# Altium PCB M52.PcbDoc
Units mil, origin at the board's own origin, x right, y up, seen from the top; angles counter-clockwise.
Board outline 3543.31 x 2274.02 mil, 2 copper layers (Top Layer, Bottom Layer); 9 components, 82 nets, 204 pads, 66 vias.
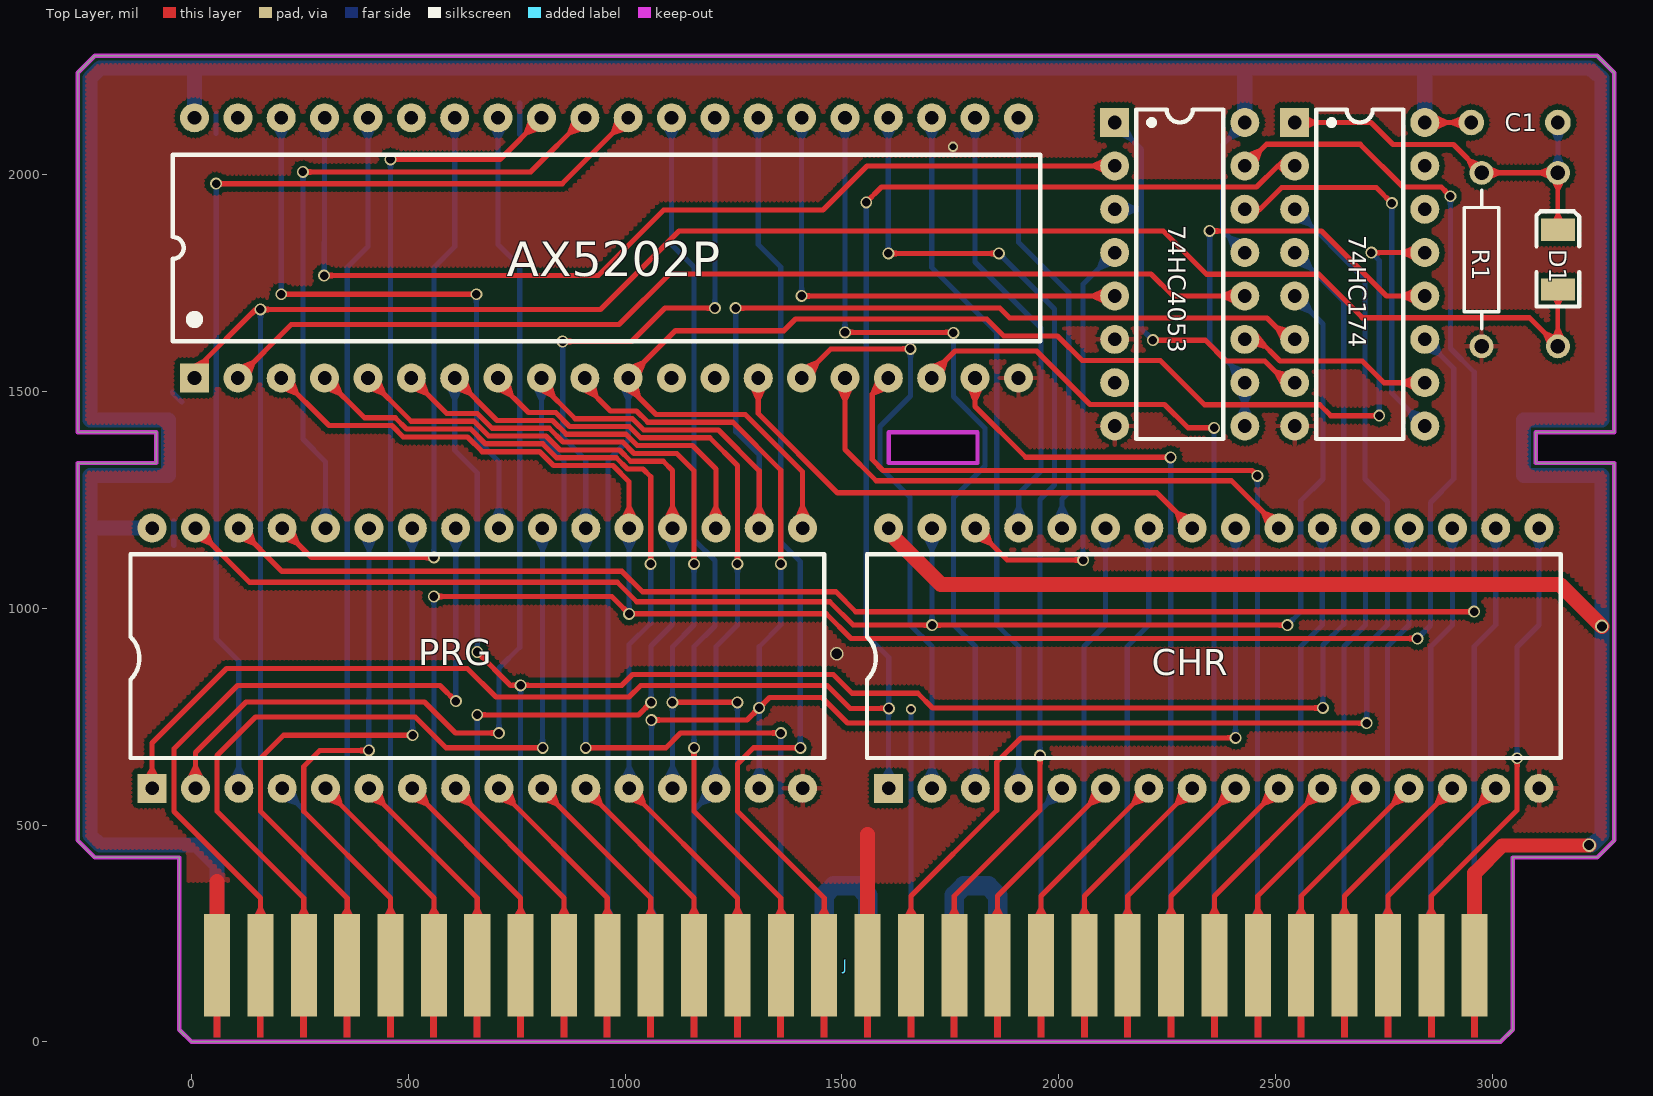
[diagram p0: Top Layer view]
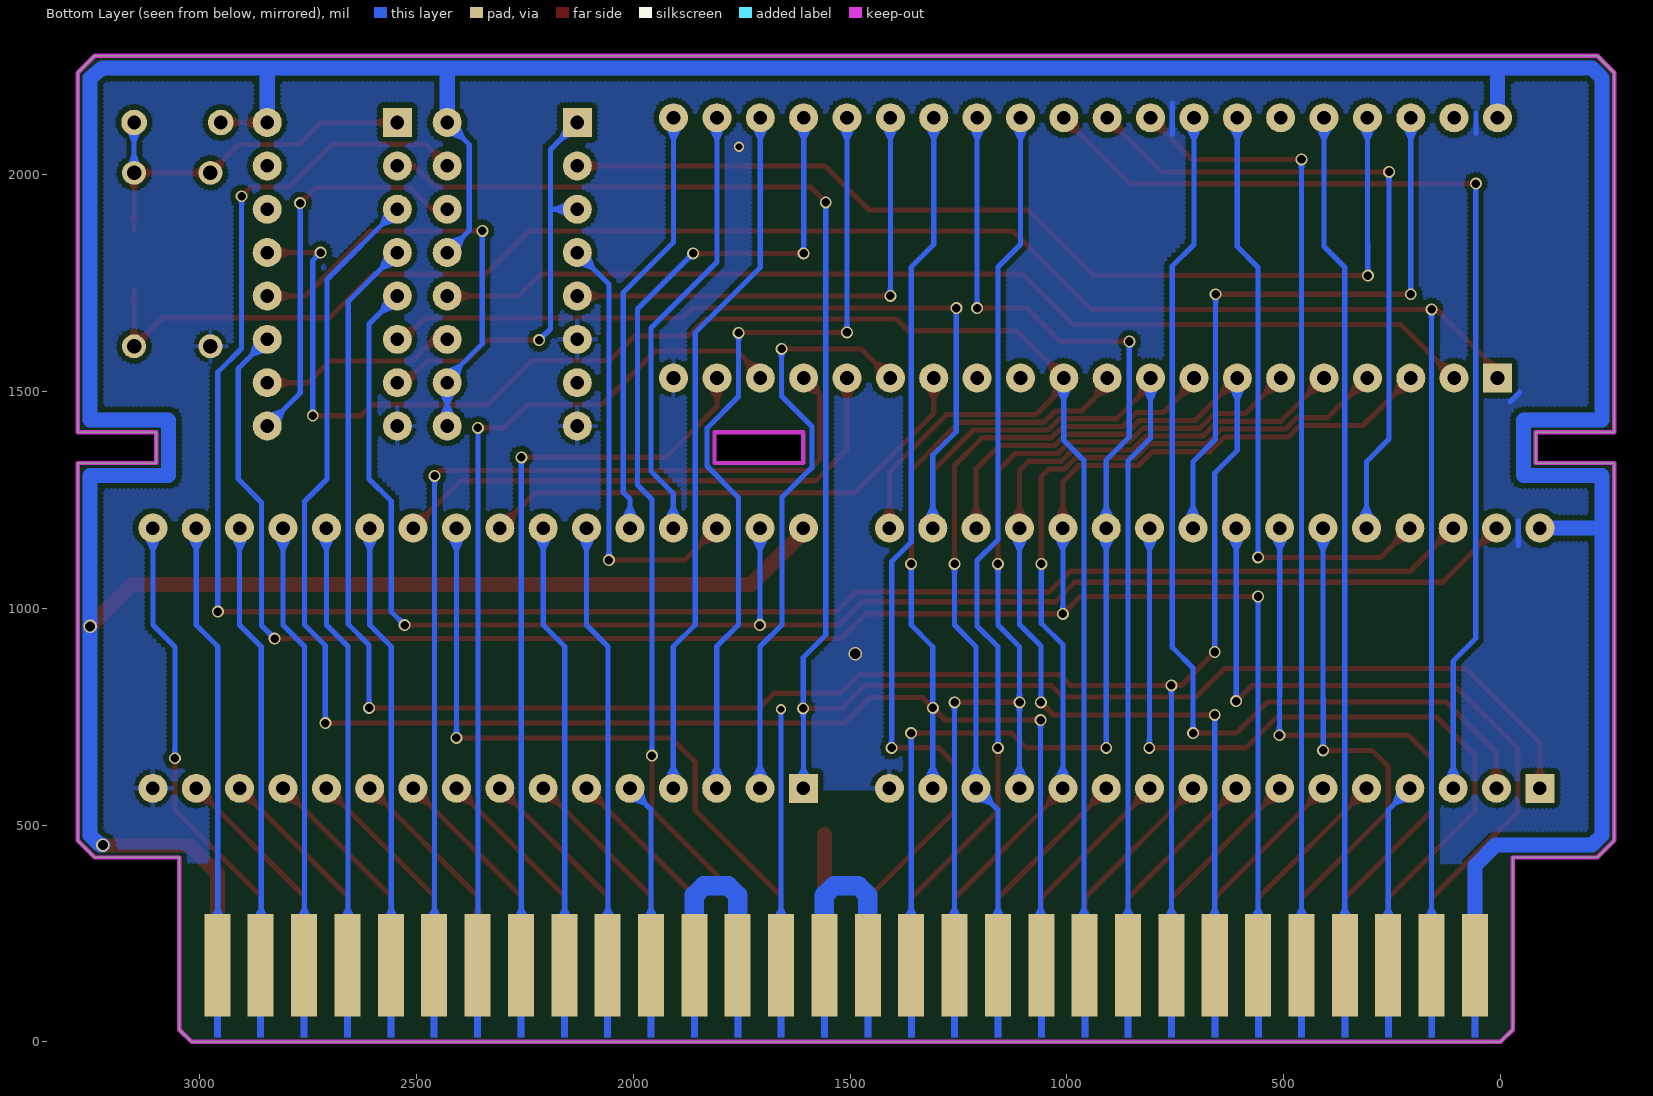
[diagram p1: Bottom Layer view, seen from below]
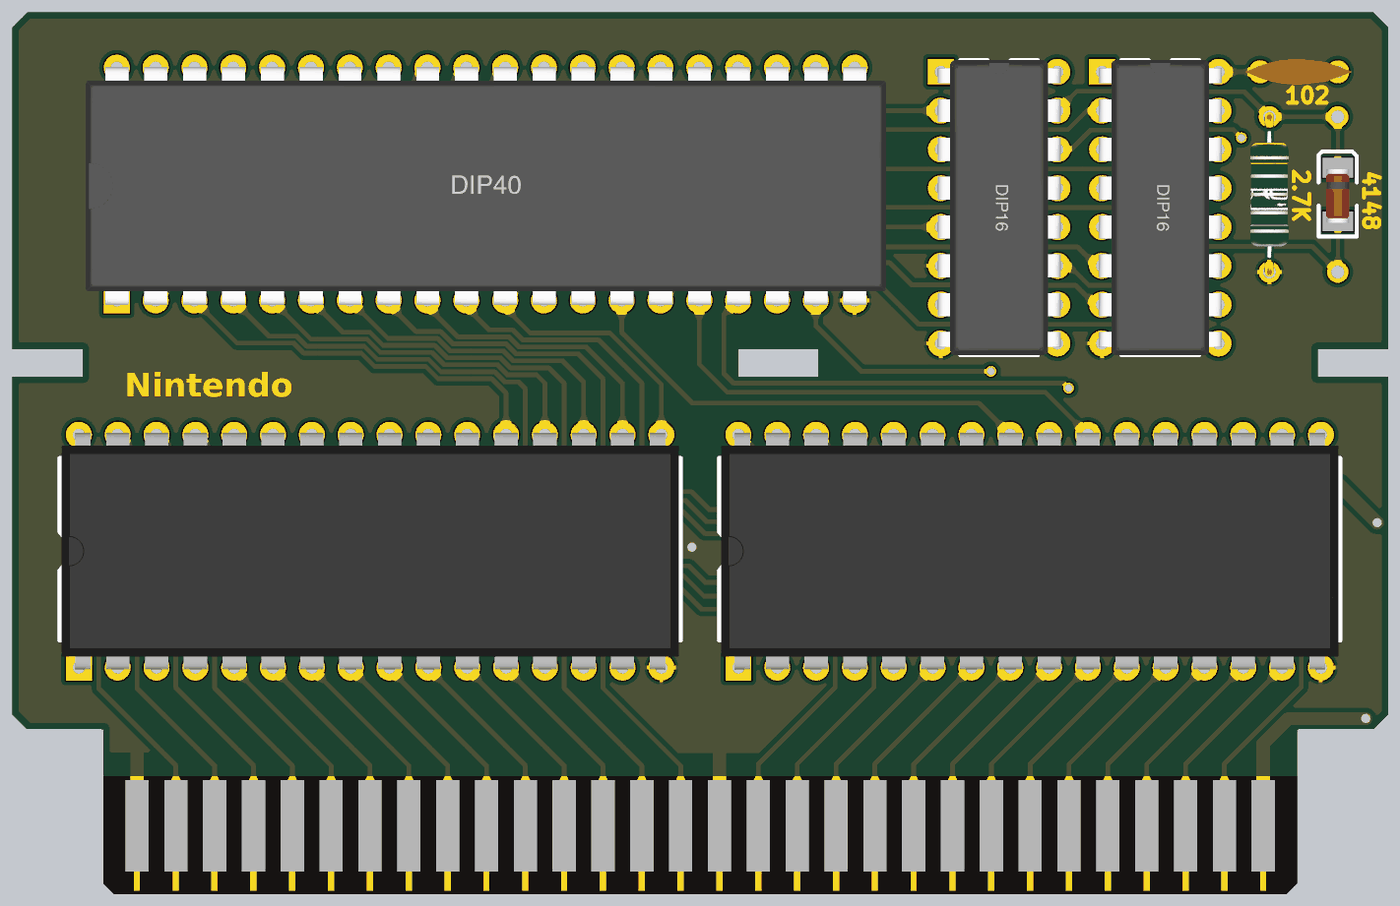
[diagram p2: 3D render of the assembled board from above, using the file's embedded part models]

## Layer stack, top to bottom
Top Solder: solder mask 0.4, Solder Resist, Dk 3.5
Top Layer: signal copper 1.4
Dielectric 1: dielectric 12.6, FR-4, Dk 4.8
Bottom Layer: signal copper 1.4
Bottom Solder: solder mask 0.4, Solder Resist, Dk 3.5

## Board outline
-222.94,425.2 -28,425.2 -28,28 0,0 3018.69,0 3046.69,28 3046.69,425.2 3241.63,425.2 3281,464.57 3281,1334.65 3099.9,1334.65 3099.9,1405.51 3281,1405.51 3281,2234.65 3241.63,2274.02 -222.94,2274.02 -262.31,2234.65 -262.31,1405.51 -81.2,1405.51 -81.2,1334.65 -262.31,1334.65 -262.31,464.57
cut-out: 1608,1334.65 1812.72,1334.65 1812.72,1405.51 1608,1405.51

## Design rules (kind name [scope] priority, off if disabled: settings)
Clearance [All] p1: gap=6 ignorepadtopadclearanceinfootprint=FALSE except(12: Arc-Poly Track-Poly SMDPad-Poly THPad-Poly Via-Poly Fill-Poly Poly-Poly)
HoleSize [All] p1: absolutevalues=TRUE maxlimit=255.91 minlimit=1 maxpercent=80.000 minpercent=20.000
HoleToHoleClearance [All] p1: gap=1 allowstackedmicrovias=TRUE
MinimumSolderMaskSliver [All] p1: minsoldermaskwidth=1
PolygonConnect PolygonConnect_1 [IsPad] p1: connectstyle=Relief reliefconductorwidth=10 reliefentries=4 polygonreliefangle="90 Angle" airgapwidth=10
PolygonConnect [All] p2: connectstyle=Direct reliefconductorwidth=10 reliefentries=4 polygonreliefangle="90 Angle" airgapwidth=10
RoutingVias [All] p1: holewidth=15.75 width=23.62 viastyle="Through Hole" minholewidth=15.75 minwidth=23.62 maxholewidth=196.85 maxwidth=216.54
SilkToSilkClearance [All] p1: silktosilkclearance=0
SilkToSolderMaskClearance [IsPad] p1: minsilkscreentomaskgap=0 clearancetoexposedcopper=TRUE
SolderMaskExpansion [All] p1: expansion=4
Width [All] p1: maxlimit=50 minlimit=6 preferedwidth=12
25 further rules are at their usual default settings.

## Components (designator, comment, footprint, x,y, rotation, side; value= is the part's Value field where it differs from the comment)
74HC174 "CD74HC174" DIP16 2694,1770 r0 top locked (schematic designator U4)
74HC4053 "74HC4053" DIP16 2279,1770 r0 top locked (schematic designator U5)
AX5202P "AX5202P" DIP40 957,1830.83 r90 top locked (schematic designator U1)
C1 "" RAD-0.2 3151,2120 r180 top
CHR "27C801" DIP32 2357.62,884.65 r90 top locked (schematic designator U8)
D1 "" 4148 3151,1735 r90 top
J "60P" 60P-3(J)(L) 1509,177 r0 top locked
PRG "27C801" DIP32 659.24,884.65 r90 top locked (schematic designator U7)
R1 "" AXIAL0.4 2935,2134 r270 top

## Footprints (in the part's own frame and the unit in brackets; to place one, negate y for a bottom-side part, rotate by r counter-clockwise, add the part's x,y. Pads: shape width x height; smd on the part's side, far side on the other; paste and mask are expansions set on the pad)
60P-3(J)(L) [mil]
  rect 60x236.22 smd: 1(-1450,0) 2(-1350,0) 3(-1250,0) 4(-1150,0) 5(-1050,0) 6(-950,0) 7(-850,0) 8(-750,0) 9(-650,0) 10(-550,0) 11(-450,0) 12(-350,0) 13(-250,0) 14(-150,0) 15(-50,0) 16(50,0) 17(150,0) 18(250,0) 19(350,0) 20(450,0) 21(550,0) 22(650,0) 23(750,0) 24(850,0) 25(950,0) 26(1050,0) 27(1150,0) 28(1250,0) 29(1350,0) 30(1450,0)
  rect 60x236.22 smd far side: 31(-1450,0) 32(-1350,0) 33(-1250,0) 34(-1150,0) 35(-1050,0) 36(-950,0) 37(-850,0) 38(-750,0) 39(-650,0) 40(-550,0) 41(-450,0) 42(-350,0) 43(-250,0) 44(-150,0) 45(-50,0) 46(50,0) 47(150,0) 48(250,0) 49(350,0) 50(450,0) 51(550,0) 52(650,0) 53(750,0) 54(850,0) 55(950,0) 56(1050,0) 57(1150,0) 58(1250,0) 59(1350,0) 60(1450,0)
  Top Layer region: 1441.98,-166.91 1458.04,-166.91 1458.04,-101.91 1441.98,-101.91
  Top Layer region: 1341.98,-166.91 1358.04,-166.91 1358.04,-101.91 1341.98,-101.91
  Top Layer region: 1241.94,-166.91 1258,-166.91 1258,-101.91 1241.94,-101.91
  Top Layer region: 1141.94,-166.91 1158,-166.91 1158,-101.91 1141.94,-101.91
  Top Layer region: 1041.9,-166.91 1057.96,-166.91 1057.96,-101.91 1041.9,-101.91
  Top Layer region: 941.9,-166.91 957.96,-166.91 957.96,-101.91 941.9,-101.91
  Top Layer region: 841.9,-166.91 857.96,-166.91 857.96,-101.91 841.9,-101.91
  Top Layer region: 741.86,-166.91 757.92,-166.91 757.92,-101.91 741.86,-101.91
  Top Layer region: 641.86,-166.91 657.92,-166.91 657.92,-101.91 641.86,-101.91
  Top Layer region: 541.82,-166.91 557.88,-166.91 557.88,-101.91 541.82,-101.91
  Top Layer region: 441.82,-166.91 457.88,-166.91 457.88,-101.91 441.82,-101.91
  Top Layer region: 341.82,-166.91 357.88,-166.91 357.88,-101.91 341.82,-101.91
  Top Layer region: 241.78,-166.91 257.84,-166.91 257.84,-101.91 241.78,-101.91
  Top Layer region: 141.78,-166.91 157.84,-166.91 157.84,-101.91 141.78,-101.91
  Top Layer region: 41.74,-166.91 57.8,-166.91 57.8,-101.91 41.74,-101.91
  Top Layer region: -58.26,-166.91 -42.2,-166.91 -42.2,-101.91 -58.26,-101.91
  Top Layer region: -158.26,-166.91 -142.2,-166.91 -142.2,-101.91 -158.26,-101.91
  Top Layer region: -258.3,-166.91 -242.24,-166.91 -242.24,-101.91 -258.3,-101.91
  Top Layer region: -358.3,-166.91 -342.24,-166.91 -342.24,-101.91 -358.3,-101.91
  Top Layer region: -458.34,-166.91 -442.28,-166.91 -442.28,-101.91 -458.34,-101.91
  Top Layer region: -558.34,-166.91 -542.28,-166.91 -542.28,-101.91 -558.34,-101.91
  Top Layer region: -658.38,-166.91 -642.31,-166.91 -642.31,-101.91 -658.38,-101.91
  Top Layer region: -758.38,-166.91 -742.31,-166.91 -742.31,-101.91 -758.38,-101.91
  Top Layer region: -858.38,-166.91 -842.31,-166.91 -842.31,-101.91 -858.38,-101.91
  Top Layer region: -958.42,-166.91 -942.35,-166.91 -942.35,-101.91 -958.42,-101.91
  Top Layer region: -1058.42,-166.91 -1042.35,-166.91 -1042.35,-101.91 -1058.42,-101.91
  Top Layer region: -1158.46,-166.91 -1142.39,-166.91 -1142.39,-101.91 -1158.46,-101.91
  Top Layer region: -1258.46,-166.91 -1242.39,-166.91 -1242.39,-101.91 -1258.46,-101.91
  Top Layer region: -1358.46,-166.91 -1342.39,-166.91 -1342.39,-101.91 -1358.46,-101.91
  Top Layer region: -1458.5,-166.91 -1442.43,-166.91 -1442.43,-101.91 -1458.5,-101.91
  Bottom Layer region: -1458.5,-166.91 -1442.43,-166.91 -1442.43,-101.91 -1458.5,-101.91
  Bottom Layer region: -1358.46,-166.91 -1342.39,-166.91 -1342.39,-101.91 -1358.46,-101.91
  Bottom Layer region: -1258.46,-166.91 -1242.39,-166.91 -1242.39,-101.91 -1258.46,-101.91
  Bottom Layer region: -1158.46,-166.91 -1142.39,-166.91 -1142.39,-101.91 -1158.46,-101.91
  Bottom Layer region: -1058.42,-166.91 -1042.35,-166.91 -1042.35,-101.91 -1058.42,-101.91
  Bottom Layer region: -958.42,-166.91 -942.35,-166.91 -942.35,-101.91 -958.42,-101.91
  Bottom Layer region: -858.38,-166.91 -842.31,-166.91 -842.31,-101.91 -858.38,-101.91
  Bottom Layer region: -758.38,-166.91 -742.31,-166.91 -742.31,-101.91 -758.38,-101.91
  Bottom Layer region: -658.38,-166.91 -642.31,-166.91 -642.31,-101.91 -658.38,-101.91
  Bottom Layer region: -558.34,-166.91 -542.28,-166.91 -542.28,-101.91 -558.34,-101.91
  Bottom Layer region: -458.34,-166.91 -442.28,-166.91 -442.28,-101.91 -458.34,-101.91
  Bottom Layer region: -358.3,-166.91 -342.24,-166.91 -342.24,-101.91 -358.3,-101.91
  Bottom Layer region: -258.3,-166.91 -242.24,-166.91 -242.24,-101.91 -258.3,-101.91
  Bottom Layer region: -158.26,-166.91 -142.2,-166.91 -142.2,-101.91 -158.26,-101.91
  Bottom Layer region: -58.26,-166.91 -42.2,-166.91 -42.2,-101.91 -58.26,-101.91
  Bottom Layer region: 41.74,-166.91 57.8,-166.91 57.8,-101.91 41.74,-101.91
  Bottom Layer region: 141.78,-166.91 157.84,-166.91 157.84,-101.91 141.78,-101.91
  Bottom Layer region: 241.78,-166.91 257.84,-166.91 257.84,-101.91 241.78,-101.91
  Bottom Layer region: 341.82,-166.91 357.88,-166.91 357.88,-101.91 341.82,-101.91
  Bottom Layer region: 441.82,-166.91 457.88,-166.91 457.88,-101.91 441.82,-101.91
  Bottom Layer region: 541.82,-166.91 557.88,-166.91 557.88,-101.91 541.82,-101.91
  Bottom Layer region: 641.86,-166.91 657.92,-166.91 657.92,-101.91 641.86,-101.91
  Bottom Layer region: 741.86,-166.91 757.92,-166.91 757.92,-101.91 741.86,-101.91
  Bottom Layer region: 841.9,-166.91 857.96,-166.91 857.96,-101.91 841.9,-101.91
  Bottom Layer region: 941.9,-166.91 957.96,-166.91 957.96,-101.91 941.9,-101.91
  Bottom Layer region: 1041.9,-166.91 1057.96,-166.91 1057.96,-101.91 1041.9,-101.91
  Bottom Layer region: 1141.94,-166.91 1158,-166.91 1158,-101.91 1141.94,-101.91
  Bottom Layer region: 1241.94,-166.91 1258,-166.91 1258,-101.91 1241.94,-101.91
  Bottom Layer region: 1341.98,-166.91 1358.04,-166.91 1358.04,-101.91 1341.98,-101.91
  Bottom Layer region: 1441.98,-166.91 1458.04,-166.91 1458.04,-101.91 1441.98,-101.91
4148 [mm]
  round 1.4 hole 0.85: A(-3.329,0) K(6.831,0)
  rect 1.3x2 smd: A(0,0) K(3.5,0)
  Top Layer lines w0.254: -3.329,0 0,0 ; 3.5,0 5.84,0 6.831,0
  silkscreen extent -1,-1.25 4.57,1.25, body extent -0.1,-0.75 3.4,0.75, height 1.5
AXIAL0.4 [mm] "1/4W/1/2W"
  round 1.4 hole 0.85: 1(3.302,1.016) 2(13.462,1.016)
  silkscreen extent 4.32,0 12.45,2.03, body extent 3,-0.24 13.76,2.28, height 2.63
DIP16 [mm]
  rect 1.7x1.7 hole 0.8: 1(-3.81,8.89)
  round 1.7 hole 0.8: 2(-3.81,6.35) 3(-3.81,3.81) 4(-3.81,1.27) 5(-3.81,-1.27) 6(-3.81,-3.81) 7(-3.81,-6.35) 8(-3.81,-8.89) 9(3.81,-8.89) 10(3.81,-6.35) 11(3.81,-3.81) 12(3.81,-1.27) 13(3.81,1.27) 14(3.81,3.81) 15(3.81,6.35) 16(3.81,8.89)
  silkscreen extent -2.54,-9.65 2.54,9.65, body extent -4.02,-9.65 4.02,9.65, height 4.45
DIP32 [mm]
  rect 1.7x1.7 hole 0.8: 1(-7.62,19.05)
  round 1.7 hole 0.8: 2(-7.62,16.51) 3(-7.62,13.97) 4(-7.62,11.43) 5(-7.62,8.89) 6(-7.62,6.35) 7(-7.62,3.81) 8(-7.62,1.27) 9(-7.62,-1.27) 10(-7.62,-3.81) 11(-7.62,-6.35) 12(-7.62,-8.89) 13(-7.62,-11.43) 14(-7.62,-13.97) 15(-7.62,-16.51) 16(-7.62,-19.05) 17(7.62,-19.05) 18(7.62,-16.51) 19(7.62,-13.97) 20(7.62,-11.43) 21(7.62,-8.89) 22(7.62,-6.35) 23(7.62,-3.81) 24(7.62,-1.27) 25(7.62,1.27) 26(7.62,3.81) 27(7.62,6.35) 28(7.62,8.89) 29(7.62,11.43) 30(7.62,13.97) 31(7.62,16.51) 32(7.62,19.05)
  silkscreen extent -5.84,-20.32 6.1,20.32, body extent -7.75,-20.21 7.75,20.19, height 5
DIP40 [mm]
  rect 1.7x1.7 hole 0.8: 1(-7.62,24.13)
  round 1.7 hole 0.8: 2(-7.62,21.59) 3(-7.62,19.05) 4(-7.62,16.51) 5(-7.62,13.97) 6(-7.62,11.43) 7(-7.62,8.89) 8(-7.62,6.35) 9(-7.62,3.81) 10(-7.62,1.27) 11(-7.62,-1.27) 12(-7.62,-3.81) 13(-7.62,-6.35) 14(-7.62,-8.89) 15(-7.62,-11.43) 16(-7.62,-13.97) 17(-7.62,-16.51) 18(-7.62,-19.05) 19(-7.62,-21.59) 20(-7.62,-24.13) 21(7.62,-24.13) 22(7.62,-21.59) 23(7.62,-19.05) 24(7.62,-16.51) 25(7.62,-13.97) 26(7.62,-11.43) 27(7.62,-8.89) 28(7.62,-6.35) 29(7.62,-3.81) 30(7.62,-1.27) 31(7.62,1.27) 32(7.62,3.81) 33(7.62,6.35) 34(7.62,8.89) 35(7.62,11.43) 36(7.62,13.97) 37(7.62,16.51) 38(7.62,19.05) 39(7.62,21.59) 40(7.62,24.13)
  silkscreen extent -5.46,-25.4 5.46,25.4, body extent -7.91,-26.19 7.65,26.16, height 4.7
RAD-0.2 [mm]
  round 1.5 hole 0.8: 1(0,0) 2(5.08,0)
  body extent -0.96,-0.85 6.04,0.85, height 7.06

## Part data
74HC174: "高速CMOS逻辑六路D类触发器与复位"
AX5202P: "MMC3"
C1: library part CAP, "无极性电容"
CHR PRG: "8兆位1M ×8紫外线可擦除CMOS EPROM"
D1: library part 1n4148
J: "金手指"
R1: library part RES

## Via types
v1: diameter 27.56, hole 19.68, Top Layer to Bottom Layer, 61 vias
v2: diameter 31.5, hole 23.62, Top Layer to Bottom Layer, tented both sides, 3 vias
v3: diameter 23.62, hole 15.75, Top Layer to Bottom Layer, 2 vias

## Nets (pads, with @x,y where several pads share a name; then routed paths per layer and width w, separated by ;. In a path a pad name is that pad's centre, name@x,y a point inside that pad or via, vN(x,y) a via of type N, cw(c..) or ccw(c..) an arc to the next point about the centre after c; other vN are vias at no path point)
"CHR A0": CHR.12 J.25 | length 505.6
  Top Layer w12: J.25@2459,182 2459,336.02 CHR.12
"CHR A1": CHR.11 J.24 | length 505.6
  Top Layer w12: J.24@2359,182 2359,336.02 CHR.11
"CHR A2": CHR.10 J.23 | length 505.6
  Top Layer w12: J.23@2259,182 2259,336.02 CHR.10
"CHR A3": CHR.9 J.22 | length 505.6
  Top Layer w12: J.22@2159,182 2159,336.02 CHR.9
"CHR A4": CHR.8 J.21 | length 505.6
  Top Layer w12: J.21@2059,182 2059,336.02 CHR.8
"CHR A5": CHR.7 J.20 | length 505.6
  Top Layer w12: J.20@1959,182 1959,336.02 CHR.7
"CHR A6": CHR.6 J.19 | length 505.6
  Top Layer w12: J.19@1859,182 1859,336.02 CHR.6
"CHR A7": CHR.5 J.50 | length 422.8
  Bottom Layer w12: J.50@1959,182 1959,536.02 CHR.5
"CHR A8": CHR.27 J.51 | length 988.4
  Bottom Layer w12: J.51@2058,216.79 2058,911.38 2107.62,961 CHR.27
"CHR A9": CHR.26 J.52 | length 988.4
  Bottom Layer w12: J.52@2158,216.79 2158,911.38 2207.62,961 CHR.26
"CHR A10": AX5202P.16 CHR.23 | length 1240.6
  Top Layer w12: AX5202P.16 1507,1366 1579,1294 2398.27,1294 CHR.23
"CHR A11": AX5202P.14 CHR.25 | length 1191.9
  Top Layer w12: AX5202P.14 1307,1449 1490,1266 2226.27,1266 CHR.25
"CHR A12": AX5202P.23 CHR.4 | length 1629.3
  Bottom Layer w12: AX5202P.23 1707,1786 1857,1636 1857,962 1907.62,911.38 CHR.4
"CHR A13": AX5202P.21 CHR.28 | length 1000.6
  Bottom Layer w12: AX5202P.21 1907,1844 2023,1728 2023,1267 2007.62,1251.62 CHR.28
"CHR A14": AX5202P.22 CHR.29 | length 1030.4
  Bottom Layer w12: AX5202P.22 1807,1798 1959,1646 1959,1316 1907.62,1264.62 CHR.29
"CHR A15": AX5202P.25 CHR.3 | length 1876.6
  Top Layer w12: v1(1507,1636) v1@1757,1636
  Bottom Layer w12: v1(1507,1636) AX5202P.25 ; v1(1757,1635) 1757,1488 1830,1415 1830,1327.88 1757,1254.88 1757,962 1807.62,911.38 CHR.3
"CHR A16": AX5202P.15 CHR.2 | length 1371.2
  Top Layer w12: AX5202P.15 1474.17,1598 v1(1658,1598)
  Bottom Layer w12: v1(1658,1598) 1658.24,1597.76 1658.24,1489.24 1588,1419 1588,1324.6 1594.96,1317.65 1595.35,1317.65 1657,1256 1657,962 1707.62,911.38 CHR.2
"CHR CE": CHR.22 J.56 | length 988.4
  Bottom Layer w12: J.56@2558,216.79 2558,911.38 2607.62,961 CHR.22
"CHR D0": CHR.13 J.26 | length 505.6
  Top Layer w12: J.26@2559,182 2559,336.02 CHR.13
"CHR D1": CHR.14 J.27 | length 505.6
  Top Layer w12: J.27@2659,182 2659,336.02 CHR.14
"CHR D2": CHR.15 J.28 | length 505.6
  Top Layer w12: J.28@2759,182 2759,336.02 CHR.15
"CHR D3": CHR.17 J.29 | length 1105.6
  Top Layer w12: J.29@2859,182 2859,336.02 3057,534.02 v1(3057,654)
  Bottom Layer w12: v1(3057,654) 3057,910.38 3107.62,961 CHR.17
"CHR D4": CHR.18 J.60 | length 988.4
  Bottom Layer w12: J.60@2958,216.79 2958,911.38 3007.62,961 CHR.18
"CHR D5": CHR.19 J.59 | length 988.4
  Bottom Layer w12: J.59@2858,216.79 2858,911.38 2907.62,961 CHR.19
"CHR D6": CHR.20 J.58 | length 988.4
  Bottom Layer w12: J.58@2758,216.79 2758,911.38 2807.62,961 CHR.20
"CHR D7": CHR.21 J.57 | length 988.4
  Bottom Layer w12: J.57@2658,216.79 2658,911.38 2707.62,961 CHR.21
"CHR OE": CHR.24 J.17 | length 1602.5
  Top Layer w12: J.17@1659,182 1659,336.02 1857,534.02 1857,645 1913,701 v1(2407.62,701)
  Bottom Layer w12: v1(2407.62,701) CHR.24
"CHR WE": J.47 | length 587
  Bottom Layer w12: J.47@1659,182 v3(1659,767.03) v3@1659,769
CIRAM: AX5202P.24 J.18 | length 2352.5
  Top Layer w12: v1(1607,1818) v1(1862,1818) ; J.18@1759,182 1759,336.02 1957,534.02 v1(1957,660)
  Bottom Layer w12: v1(1607,1818) AX5202P.24 ; v1(1862,1818) 1990,1690 1990,1284 1957,1251 v1(1957,660)
"CPU A13": AX5202P.36 J.34 | length 1968.7
  Bottom Layer w12: J.34@359,182 359,1786 407,1834 AX5202P.36
"CPU A14": AX5202P.32 J.35 | length 2240.7
  Top Layer w12: v1(459,2035) 711.17,2035 AX5202P.32
  Bottom Layer w12: J.35@459,182 v1(459,2035)
GND: 74HC174.8 74HC4053.6 74HC4053.8 AX5202P.20 CHR.16 J.1 J.16 PRG.16 R1.2 | length 688.5
  Top Layer w35: J.1@59,182 59,370 ; J.16@1559,182 1559,478
  Bottom Layer w12: -43.61,1497.75 -43.61,1497.54 -21.59,1475.52 ; -41,1145 -41,1200.66 ; 56.73,2095.27 56.73,2140.72 ; 757,2093 757,2165
  other v2: 1488,895
  other v3: 1756,2064
IRQ: AX5202P.27 J.15 | length 2191
  Top Layer w12: v1(1404,678) 1296,678 1259,641 1259,531.89 1459,331.89 J.15@1459,186.13
  Bottom Layer w12: AX5202P.27 1307,1839 1359,1787 1359,1153 1404,1108 v1(1404,678)
M2: AX5202P.1 D1.A J.32 | length 4911.8
  Top Layer w12: AX5202P.1 11,1534.83 11,1552 148,1689 v1(159,1689) 943,1689 1124,1870 2241,1870 2341,1770 2600,1770 2700,1670 3084.94,1670 D1.A@3151,1603.94
  Bottom Layer w12: J.32@159,182 v1(159,1689)
NetC1_1: 74HC174.1 C1.1 D1.K R1.1 | length 771.1
  Top Layer w12: 74HC174.1 2720,2120 2771,2069 2910,2069 R1.1 3150.94,2004 D1.K@3151,2003.94
  Bottom Layer w12: D1.K@3151,2003.94 C1.1
NetJ_45: J.45 J.46 | length 430
  Bottom Layer w45: J.45@1459,182 1459,337.84 1481.16,360 1536.84,360 1559,337.84 J.46@1559,182
NetJ_48: J.48 J.49 | length 494
  Bottom Layer w45: J.48@1759,150 J.48 1759,337.84 1781.16,360 1836.84,360 1859,337.84 J.49 J.49@1859,150
NetU1_26: 74HC4053.5 AX5202P.26 | length 1132.8
  Top Layer w12: v1(1407,1720) 74HC4053.5
  Bottom Layer w12: v1(1407,1720) AX5202P.26
NetU1_37: 74HC4053.2 AX5202P.37 | length 2292
  Top Layer w12: v1(306,1767) 938,1767 1089,1918 1456,1918 1558,2020 74HC4053.2
  Bottom Layer w12: v1(306,1767) 306,1843 307,1844 AX5202P.37
NetU2_1: 74HC174.2 CHR.1 PRG.1 | length 4330.7
  Top Layer w12: PRG.1 -90.76,689.24 81,861 636,861 702,795 1009,795 1036,822 1466,822 1519,769 v1(1608,769) ; v1(1556,1936) 1591,1971 2456,1971 2505,2020 74HC174.2
  Bottom Layer w12: v1(1556,1936) 1556,938 1608,886 v1(1608,769) ; CHR.1 v1@1607.62,769
NetU2_2: 74HC174.5 CHR.31 PRG.31 | length 3652.9
  Top Layer w12: PRG.31 133.89,1060 982,1060 1027,1015 1472,1015 1526,961 v1(1708,961) v1@2526,961
  Bottom Layer w12: v1@1707.62,961 CHR.31 ; v1(2527,961) 2558,992 2558,1247 2609,1298 2609,1655 74HC174.5
NetU2_33: 74HC4053.15 PRG.30 | length 4453.8
  Top Layer w12: PRG.30 208.89,1085 993,1085 1040,1038 1486,1038 1532,992 v1(2958,992) ; 74HC4053.15 2479,2070 2695,2070 2794,1971 2882,1971 v1(2903,1950)
  Bottom Layer w12: v1(2903,1950) 2903,1599 2958,1544 v1(2958,992)
NetU3_33: 74HC4053.4 CHR.30 | length 1018.1
  Top Layer w12: CHR.30 1881.27,1111 v1(2056,1111)
  Bottom Layer w12: v1(2056,1111) 2056,1747 74HC4053.4
NetU4_7: 74HC174.7 74HC4053.1 74HC4053.3 | length 968.5
  Top Layer w12: v1(2217,1618) 2338,1618 2386,1570 2475,1570 2525,1520 74HC174.7
  Bottom Layer w12: 74HC4053.3 2190,1920 2191,1919 ; 74HC4053.1 2191,2058 2191,1919 ; v1(2217,1618) 2191,1644 2191,1919
NetU4_9: 74HC174.9 74HC4053.14 | length 920.1
  Top Layer w12: 74HC4053.14 2464,1920 2514,1970 2732,1970 v1(2768,1934)
  Bottom Layer w12: v1(2768,1934) 2768,1496 74HC174.9
NetU4_10: 74HC174.10 74HC4053.11 | length 456.4
  Top Layer w12: 74HC4053.11 2460,1620 2510,1570 2700,1570 2750,1520 74HC174.10
NetU4_12: 74HC174.12 74HC4053.9 74HC4053.10 | length 1041.7
  Top Layer w12: v1(2348,1870) 2606,1870 2756,1720 74HC174.12
  Bottom Layer w12: v1(2348,1870) 2348,1610 2429,1529 74HC4053.10 74HC4053.9
"PPU A10": AX5202P.19 J.53 | length 1696.5
  Top Layer w12: AX5202P.19 1807,1465 1924,1348 v1(2258,1348)
  Bottom Layer w12: J.53@2258,216.79 v1(2258,1348)
"PPU A11": AX5202P.18 J.54 | length 1954.1
  Top Layer w12: AX5202P.18 1707,1539 1761,1593 1949,1593 2072,1470 2244,1470 2298,1416 v1(2358,1416)
  Bottom Layer w12: J.54@2358,216.79 v1(2358,1416)
"PPU A12": AX5202P.17 J.55 | length 2195.3
  Top Layer w12: AX5202P.17 1570,1493.83 1570,1342.6 1594.96,1317.65 2445.35,1317.65 v1(2458,1305)
  Bottom Layer w12: J.55@2458,216.79 v1(2458,1305)
"PRG A0": AX5202P.4 J.13 PRG.12 | length 2101.3
  Top Layer w12: AX5202P.4 398.83,1439 470,1439 496,1413 644.09,1413 678.09,1379 810.09,1379 842.09,1347 979.54,1347 1005.54,1321 1041,1321 1059,1303 v1(1059,1102.36) ; PRG.12@1006.24,584.65 1259,331.89 J.13@1259,186.13 ; J.13@1254.87,182 J.13@1259,186.13 ; J.13@1259,182 J.13@1259,186.13 ; J.13@1261,188.13 J.13@1259,186.13
  Bottom Layer w12: PRG.12 1009.24,915.6 1059,965.35 v1(1059,1102.36)
"PRG A1": J.12 PRG.11 | length 503.2
  Top Layer w12: PRG.11@906.24,584.65 1159,331.89 J.12@1159,186.13
"PRG A2": J.11 PRG.10 | length 503.2
  Top Layer w12: PRG.10@806.24,584.65 1059,331.89 J.11@1059,186.13
"PRG A3": J.10 PRG.9 | length 503.2
  Top Layer w12: PRG.9@706.24,584.65 959,331.89 J.10@959,186.13
"PRG A4": J.9 PRG.8 | length 503.2
  Top Layer w12: PRG.8@606.24,584.65 859,331.89 J.9@859,186.13
"PRG A5": J.8 PRG.7 | length 503.2
  Top Layer w12: PRG.7@506.24,584.65 759,331.89 J.8@759,186.13
"PRG A6": J.7 PRG.6 | length 503.2
  Top Layer w12: PRG.6@406.24,584.65 659,331.89 J.7@659,186.13
"PRG A7": J.6 PRG.5 | length 503.2
  Top Layer w12: PRG.5@306.24,584.65 559,331.89 J.6@559,186.13
"PRG A8": J.5 PRG.27 | length 1209.8
  Top Layer w12: v1(409,672) 296,672 259,635 259,531.89 459,331.89 J.5@459,186.13
  Bottom Layer w12: v1(409,672) 409,791.51 409.24,791.76 PRG.27
"PRG A9": J.4 PRG.26 | length 1401.6
  Top Layer w12: J.4@359,186.13 359,331.89 159,531.89 159,654 212,707 v1(510,707)
  Bottom Layer w12: PRG.26 509.24,796.76 510,796 v1(510,707)
"PRG A10": J.3 PRG.23 | length 1880.6
  Top Layer w12: J.3@259,186.13 259,331.89 59,531.89 59,660 148,749 516,749 587,678 v1(810,678)
  Bottom Layer w12: v1@809.24,678 PRG.23
"PRG A11": J.2 PRG.25 | length 1696.5
  Top Layer w12: J.2@159,186.13 159,331.89 -40,530.89 -40,676 106,822 573,822 v1(609.5,785.5)
  Bottom Layer w12: v1@609.24,785.5 PRG.25
"PRG A12": J.33 PRG.4 | length 423.3
  Bottom Layer w12: PRG.4 259,534.89 J.33@259,182
"PRG A13": AX5202P.31 PRG.28 | length 1544.7
  Top Layer w12: v1(257,2006) 782.17,2006 AX5202P.31
  Bottom Layer w12: v1(257,2006) 257,1390 309.24,1337.76 PRG.28
"PRG A14": AX5202P.34 PRG.29 | length 1411.5
  Top Layer w12: PRG.29 276.89,1117 v1(559,1117)
  Bottom Layer w12: v1(559,1117) 559,1786 607,1834 AX5202P.34
"PRG A15": AX5202P.30 PRG.3 | length 2428.9
  Top Layer w12: v1(57,1979) 855.17,1979 AX5202P.30
  Bottom Layer w12: v1(57,1979) 57,930 109.24,877.76 PRG.3
"PRG A16": AX5202P.33 PRG.2 | length 2320
  Top Layer w12: PRG.2 9.24,667.24 126,784 537,784 609,712 v1(709,712)
  Bottom Layer w12: AX5202P.33 707,1839 757,1789 757,910 709,862 v1(709,712)
"PRG CE": AX5202P.38 PRG.24 | length 1417.8
  Top Layer w12: v1(207,1724) v1(657,1724)
  Bottom Layer w12: v1(207,1724) AX5202P.38 ; v1(657,1724) 657,1390 709.24,1337.76 PRG.24
"PRG D0": AX5202P.6 J.43 PRG.13 | length 2248.5
  Top Layer w12: AX5202P.6 588.83,1449 659,1449 693,1415 825,1415 857,1383 994.63,1383 1020.63,1357 1119,1357 1159,1317 v1(1159,1102.36) ; v1(1109,783) v1(1259,783)
  Bottom Layer w12: PRG.13 1109.24,911.24 1159,961 v1(1159,1102.36) ; J.43@1259,182 v1(1259,783) v1@1259,787
"PRG D1": AX5202P.8 J.42 PRG.14 | length 1829.8
  Top Layer w12: AX5202P.8 707,1521 777,1451 839.91,1451 871.91,1419 1009.54,1419 1035.54,1393 1195,1393 1259,1329 v1(1259,1102.36)
  Bottom Layer w12: J.42@1159,182 1159,534.4 PRG.14 1209.24,911.24 1259,961 v1(1259,1102.36)
"PRG D2": 74HC174.3 AX5202P.10 J.41 PRG.15 | length 4843.4
  Top Layer w12: AX5202P.10 907,1514 966,1455 1026,1455 1052,1429 1248,1429 1359,1318 v1(1359,1102.36) ; v1(1060.76,742) 1281,742 v1(1309,770) 1333,794 1454,794 1513,735 v1(2710,735)
  Bottom Layer w12: J.41@1060.76,191.35 v1(1060.76,742) ; PRG.15 1309.24,911.24 1359,961 v1(1359,1102.36) ; 74HC174.3 2706,1758 2706,1298 2758,1246 2758,962 2710,914 v1(2710,735)
"PRG D3": 74HC174.13 AX5202P.11 J.40 PRG.17 | length 4381.3
  Top Layer w12: PRG.17 1409.24,1314.76 1277,1447 1071,1447 1007,1511 AX5202P.11 1116.17,1640 1366,1640 1393,1667 1834,1667 1873,1628 1997,1628 2054,1571 2234,1571 2336,1469 2602,1469 2627,1444 v1(2739,1444) ; v1(2721,1820) 74HC174.13
  Bottom Layer w12: J.40@960.76,189.35 960.76,1340.76 1007,1387 AX5202P.11 ; v1(2721,1820) 2739,1802 v1(2739,1444)
"PRG D4": 74HC174.6 AX5202P.9 J.39 PRG.18 | length 3951.3
  Top Layer w12: AX5202P.9 807,1515 885,1437 1017,1437 1043,1411 1215,1411 1309.24,1316.76 PRG.18 ; v1(1255,1692) 1864,1692 1887,1669 2480,1669 2529,1620 74HC174.6
  Bottom Layer w12: AX5202P.9 807,1392 859,1340 J.39@859,182 ; v1(1255,1692) 1255,1407 1309.24,1352.76 PRG.18
"PRG D5": 74HC174.4 AX5202P.7 J.38 PRG.19 | length 5259.6
  Top Layer w12: AX5202P.7 704.83,1433 832.46,1433 864.46,1401 1002.09,1401 1028.09,1375 1155,1375 1209.24,1320.76 PRG.19 ; v1(659,899) 736,822 v1(759,822) 992,822 1017,847 1480,847 1523,804 1675,804 1709,770 v1(2609,770)
  Bottom Layer w12: AX5202P.7 607,1364 659,1312 v1(659,899) ; J.38@759,182 v1(759,822) ; 74HC174.4 2657,1707 2657,963 2609,915 v1(2609,770)
"PRG D6": AX5202P.5 J.37 PRG.20 | length 2330.7
  Top Layer w12: AX5202P.5 506.83,1431 651.54,1431 685.54,1397 817.54,1397 849.54,1365 987,1365 1013,1339 1088,1339 1109.24,1317.76 PRG.20 ; v1(659,754) 1031,754 v1(1060,783)
  Bottom Layer w12: J.37@659,182 v1(659,754) ; v1(1060,783) 1060,913 1109.24,962.24 PRG.20
"PRG D7": 74HC174.11 AX5202P.3 J.36 PRG.21 | length 5111.8
  Top Layer w12: AX5202P.3 316.83,1421 462.54,1421 488.54,1395 636.63,1395 670.63,1361 802.63,1361 834.63,1329 972,1329 1009.24,1291.76 PRG.21 ; v1(559,1027) 969.24,1027 v1(1009.24,987) 1464,987 1521,930 v1(2827,930)
  Bottom Layer w12: J.36@559,182 v1(559,1027) ; v1(1009.24,987) PRG.21 ; v1(2827,930) 2857,960 2857,1244 2911,1298 2911,1553 74HC174.11
"PRG WE": AX5202P.29 J.14 | length 2088.8
  Top Layer w12: v1(1159,678) 1159,531.89 1359,331.89 J.14@1359,186.13
  Bottom Layer w12: AX5202P.29 1107,1839 1159,1787 1159,1158 1207,1110 1207,959 1159,911 v1(1159,678)
ROM: AX5202P.28 J.44 PRG.22 | length 2780.6
  Top Layer w12: v1(856,1615) 1015,1615 1092,1692 v1(1207,1692) ; v1(909.24,678) 1094,678 1128,712 v1(1359,712)
  Bottom Layer w12: v1(856,1615) 856,1395 909.24,1341.76 PRG.22 v1(909.24,678) ; v1@1207,1686 v1(1207,1692) AX5202P.28 ; J.44@1359,182 v1(1359,712)
VCC: 74HC174.16 74HC4053.13 74HC4053.16 AX5202P.40 C1.2 CHR.32 J.30 J.31 PRG.32 | length 11497.2
  Top Layer w12: 74HC174.16 C1.2
  Top Layer w33: 2959,389 3022.7,452.7 v2@3223,452.7
  Top Layer w35: CHR.32 1607.62,1175.38 1728,1055 3155.5,1055 v2(3252.5,958) ; J.30@2959,182 2959,389
  Bottom Layer w12: 74HC4053.13 2378,1871 2378,2069 74HC4053.16
  Bottom Layer w35: -232.66,1184.65 PRG.32 ; AX5202P.40 7,2245.52 ; J.31@59,182 59,406 11.3,453.7 -211.13,453.7 -233.81,476.37 -233.81,1306.15 -52.7,1306.15 -52.7,1434.01 -233.81,1434.01 -233.81,2222.84 -211.13,2245.52 7,2245.52 ; 74HC4053.16 2429,2242 ; 74HC174.16 2844,2242 ; v2(3223,453.7) 3229.82,453.7 3252.5,476.37 v2(3252.5,958) 3252.5,1306.15 3071.4,1306.15 3071.4,1434.01 3252.5,1434.01 3252.5,2222.84 3223.82,2245.52 7,2245.52
"WRAM 26": AX5202P.12
"WRAM CE": 74HC4053.12 AX5202P.2 | length 2442.6
  Top Layer w12: AX5202P.2 230.17,1654 986,1654 1103,1771 2213,1771 2264,1720 74HC4053.12
"WRAM WE": AX5202P.13
pads on no net: 74HC174.14 74HC174.15 74HC4053.7 AX5202P.35 AX5202P.39

## Polygon pours and split planes (outlines as drawn)
GND on Top Layer "Top Layer-No Net" (hatched 90Degree grid 10 track 10, remove dead copper, pour order 2): 1309.24,584.65 1307.6,583 1257,583 1257,533.89 1421.89,369 1691.98,369 1857,534.02 1857,645 1943,731 1943,737 1515,737 1513,735 1463,785 1463,789 1338,789 1333,794 1306,767 1303,767 1303,764 1277,738 1277,713 1358,713 1359,712 1356,709 1356,678 1296,678 1259,641 1259,585 1266,592 1313,592
GND on Top Layer "Top Layer-No Net" (hatched 90Degree grid 10 track 10, remove dead copper, pour order 4): -51.3,371 119.89,371 -40,530.89 -40,588 -43.35,584.65 -90.76,584.65 -90.76,689.24 81,861 621,861 659,899 736,822 1466,822 1519,769 1520,770 2609,770 2644,735 2441.62,735 2405.62,699 1952,699 1949,696 1957,688 1957,581 1962,576 1970.65,584.65 3107.62,584.65 3105.98,583 3057,583 3057,534.02 2970.98,448 3008,485.02 3008,420 3228,420 3234,414 3280,460 3280,1184 3280.65,1184.65 2305.35,1184.65 2232.27,1257.73 2232.27,1260 2226.27,1266 1483,1266 1436,1313 1436,1320 1414.49,1320 1409.24,1314.76 1409.24,1184.65 -90.76,1184.65 -93.11,1187 -266,1187 -266,460 -269,457 -239,427 -239,419 -55,419 -46,410 -51,405 -51,370
GND on Top Layer "Top Layer-No Net" (hatched 90Degree grid 10 track 10, remove dead copper, pour order 6): -267,1189 -267,2221 -229,2259 -229,2260 3240,2260 3276,2224 3278,2224 3278,934 3177,1035 -254,1035
GND on Bottom Layer "Top Layer-No Net" (hatched 90Degree grid 10 track 10, remove dead copper, pour order 14): -55,413.9 159,414 159,584 158.35,584.65 108.65,584.65 111,587 109.24,588.76 109.24,877.76 53,934 53,1527 1799,1530.83 1807.62,1181.96 1907,1181.96 3110.31,1181.96 3057,910.38 3057,654 3007.62,584.65 2960,582 2960,417 2958,415 3243,415 3281,453 3278,456 3278,2211 3281,2214 3239.72,2255.28 3239.72,2259 -229,2259 -271,2217 -271,450 -236,415 -56,415
GND on Bottom Layer "Top Layer-No Net" (hatched 90Degree grid 10 track 10, remove dead copper, pour order 12): 1307,1530.83 1607,1530.83 1707.62,1430.2 1707.62,584.65 1309.24,584.65

## Keep-outs
Keep-Out Layer:
  lines w10: 1616,1334.65 1617,1334.65 ; -262.31,464.57 -262.31,1334.65 -81.2,1334.65 -81.2,1405.51 -262.31,1405.51 -262.31,2234.65 -222.94,2274.02 3241.63,2274.02 3281,2234.65 3281,1405.51 3099.9,1405.51 3099.9,1334.65 3281,1334.65 3281,464.57 3241.63,425.2 3046.69,425.2 3046.69,28 3018.69,0 0,0 -28,28 -28,425.2 -222.94,425.2 -262.31,464.57 ; 1608,1334.65 1812.72,1334.65 1812.72,1405.51 1608,1405.51 1608,1334.65

## Silkscreen, mask and mechanical layers (free items; w line width, h text height)
Top Solder:
  rectangle: -262,-46 3279,305
  text "102" at 3009,2040 h40
  text "2.7K" at 3037,1875 h40 r270
  text "4148" at 3218,1871 h40 r270
  text "Nintendo" at 27,1283 h120
Bottom Solder:
  rectangle: -262,-46 3279,305